# Altium PCB PCB.PcbDoc
Units mil, origin at the board's own origin, x right, y up, seen from the top; angles counter-clockwise.
Board outline 2885 x 3335 mil, 2 copper layers (Top Layer, Bottom Layer); 34 components, 39 nets, 135 pads, 32 vias.
Unrouted connection lines stored in the file: 2.
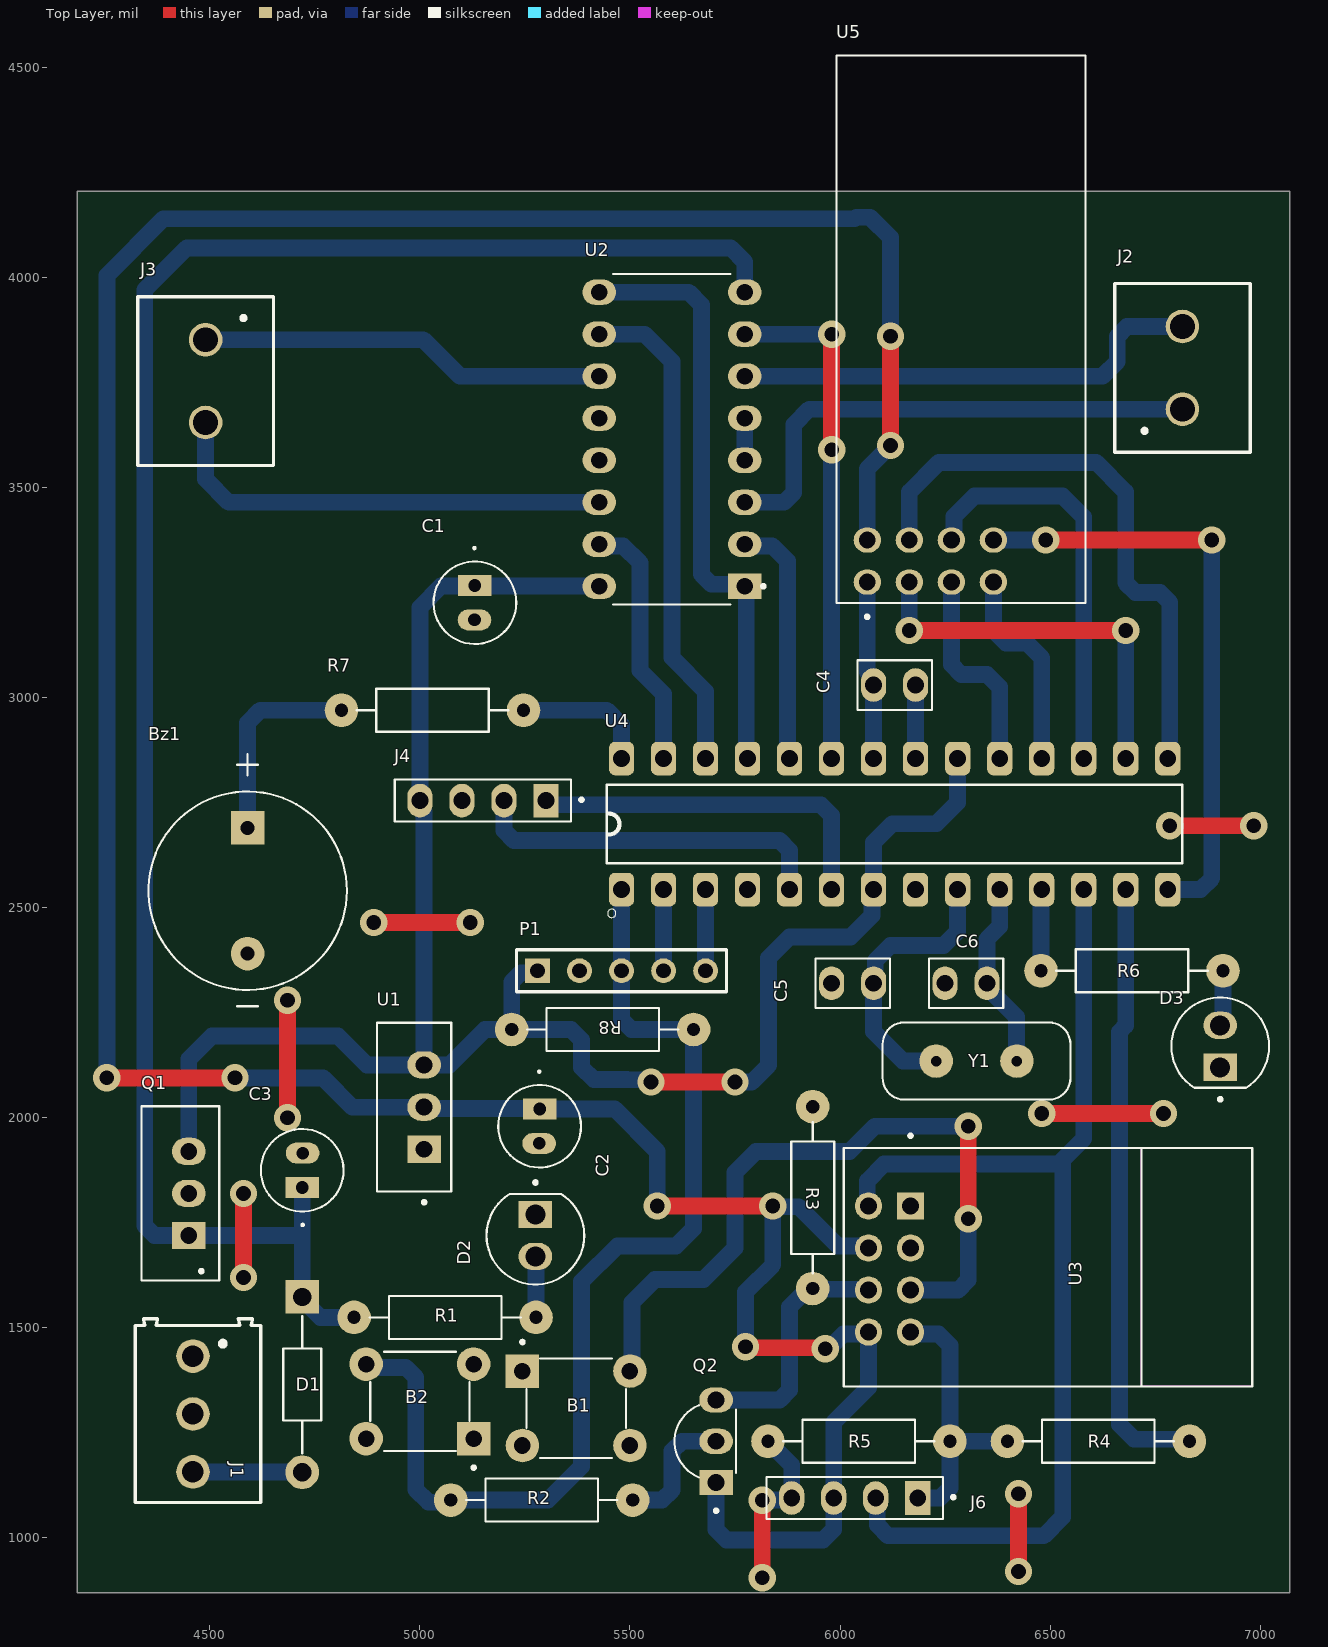
[diagram p0: Top Layer view]
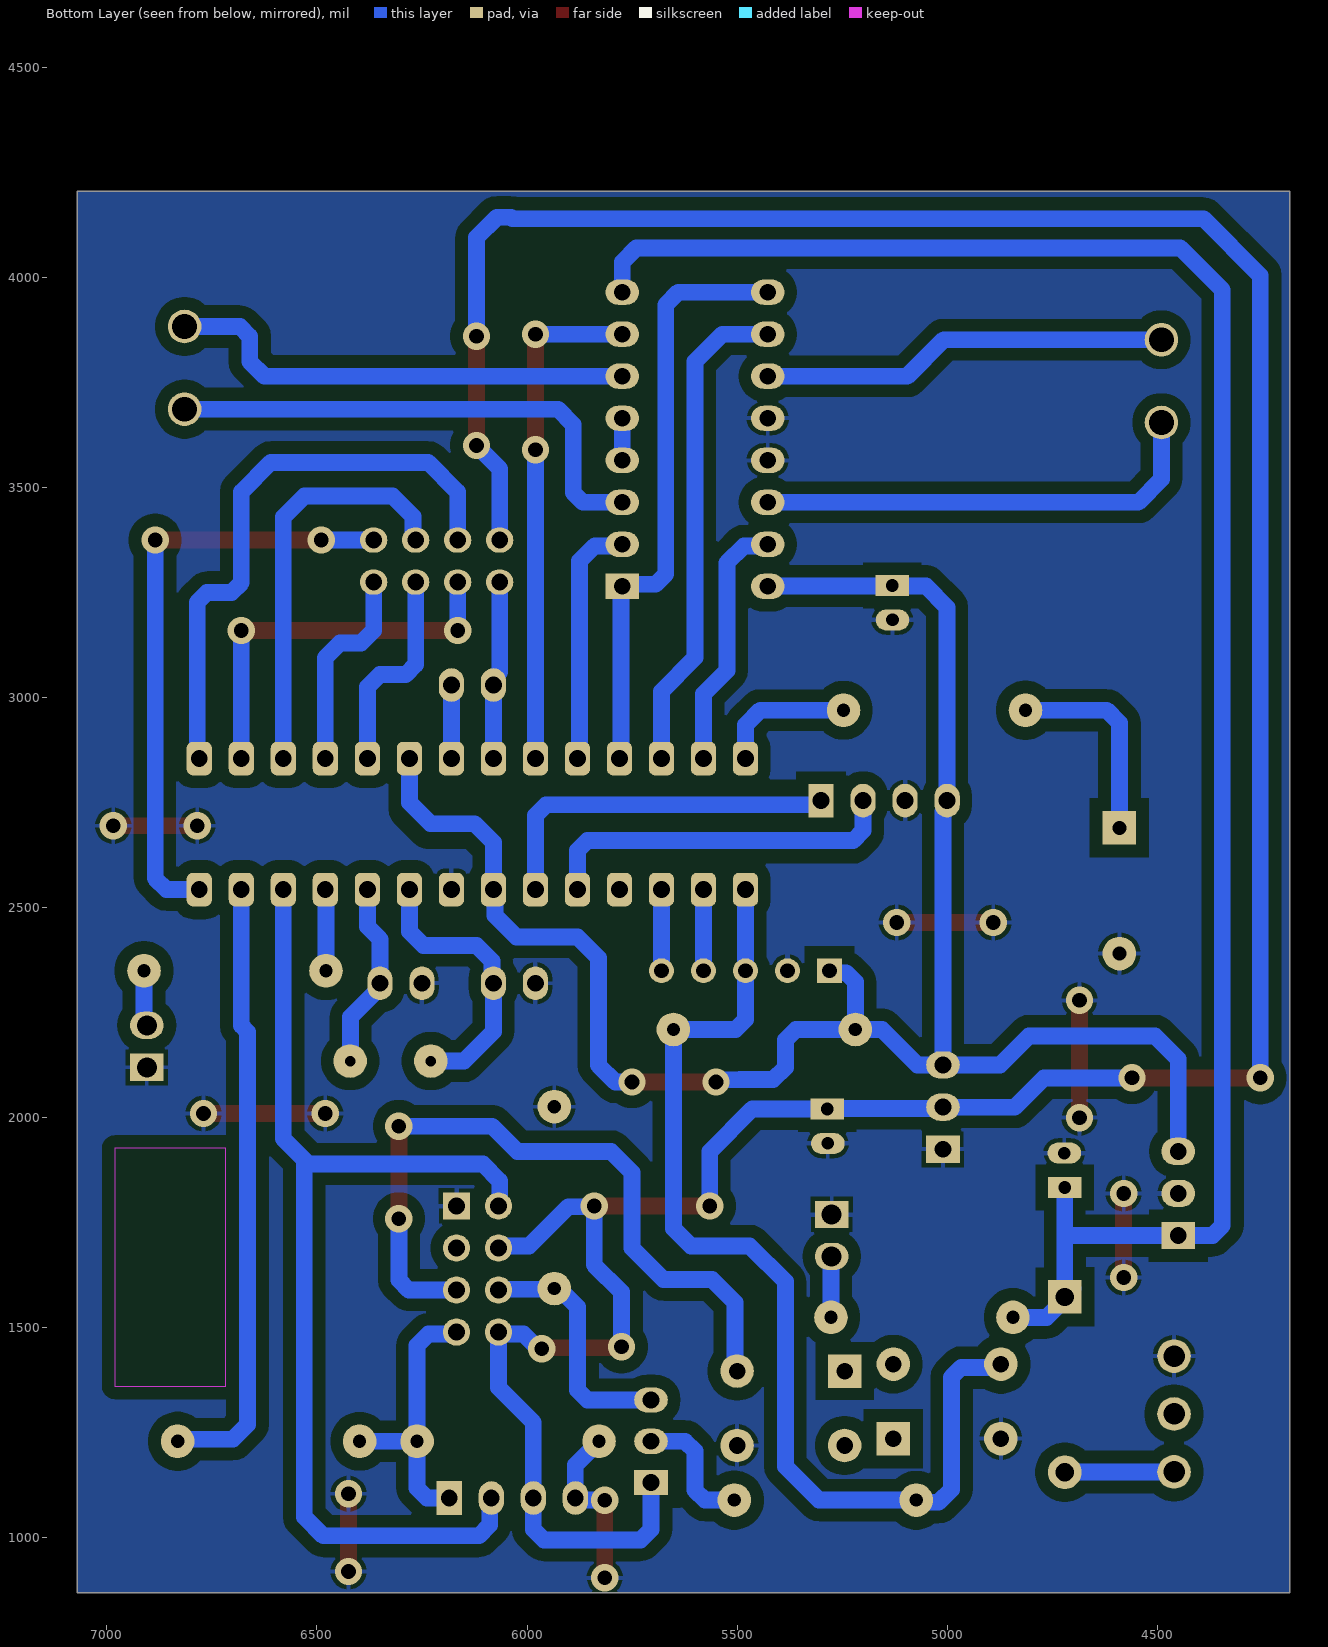
[diagram p1: Bottom Layer view, seen from below]
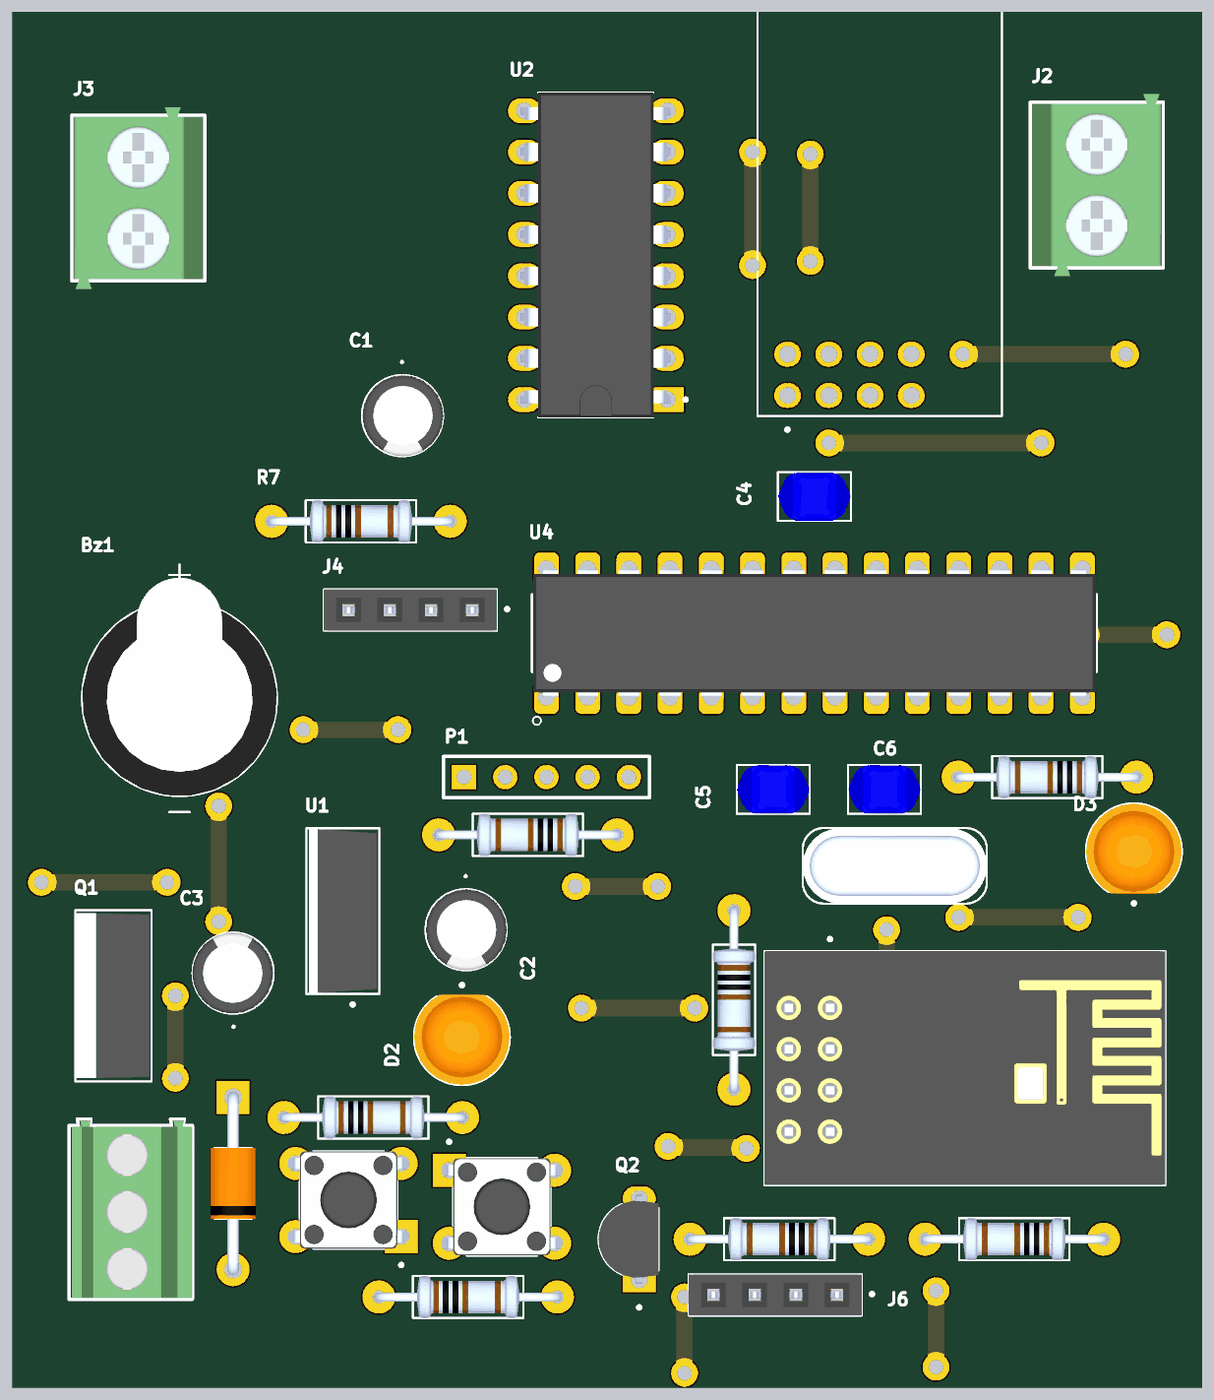
[diagram p2: 3D render of the assembled board from above, using the file's embedded part models]

## Layer stack, top to bottom
Top Solder: solder mask 0.4, Solder Resist, Dk 3.5
Top Layer: signal copper 1.4
Dielectric 1: dielectric 12.6, FR-4, Dk 4.8
Bottom Layer: signal copper 1.4
Bottom Solder: solder mask 0.4, Solder Resist, Dk 3.5

## Board outline
4185,870 7070,870 7070,4205 4185,4205

## Design rules (kind name [scope] priority, off if disabled: settings)
Clearance [All] p1: gap=30 ignorepadtopadclearanceinfootprint=FALSE
HoleSize [All] p1: absolutevalues=TRUE maxlimit=80 minlimit=40 maxpercent=80.000 minpercent=20.000
PolygonConnect [All] p1: connectstyle=Relief reliefconductorwidth=10 reliefentries=4 polygonreliefangle="90 Angle" airgapwidth=10
RoutingVias [All] p1: holewidth=40 width=70 viastyle="Through Hole" minholewidth=30 minwidth=60 maxholewidth=50 maxwidth=80
SolderMaskExpansion [All] p1: expansion=4 istentingtop=FALSE
UnRoutedNet [All] p1: checkbadconnections=TRUE
Width [All] p1: maxlimit=60 minlimit=40 preferedwidth=50
28 further rules are at their usual default settings.

## Components (designator, comment, footprint, x,y, rotation, side; value= is the part's Value field where it differs from the comment)
B1 "Push button" SW_TS02-66-95-BK-260-LCR-D 5372.05,1308.58 r0 top
B2 "Push button" SW_TS02-66-95-BK-260-LCR-D 5000,1325 r180 top
Bz1 "AI-1223-TWT-12V-R" XDCR_AI-1223-TWT-12V-R 4590,2540.39 r0 top
C1 "10uF" CAPPRD500W50D500H1100 5131,3226 r270 top
C2 "10uF" CAPPRD500W50D500H1100 5285,1980 r270 top
C3 "100uF" CAPPRD500W50D500H1100 4720,1875 r90 top
C4 "100nF" CAPRB500W50L450T300H550 6080,3030 r0 top
C5 "22pF" CAPRB500W50L450T300H550 5980,2320 r0 top
C6 "22pF" CAPRB500W50L450T300H550 6250,2320 r0 top
D1 "1N4007" DIOAD1060W70L435D230 4720,1365 r270 top
D2 "L08R5000Q1" LEDRD254W57D500H1070 5275,1720 r270 top
D3 "L08R5000Q1" LEDRD254W57D500H1070 6905,2170 r90 top
J1 "691214110003" 691214110003 4460,1295 r270 top
J2 "691111710002" 691111710002 6815,3785 r90 top
J3 "691111710002" 691111710002 4490,3753.43 r270 top
J4 "PPTC041LFBN-RC" SULLINS_PPTC041LFBN-RC 5150,2755 r180 top
J6 "PPTC041LFBN-RC" SULLINS_PPTC041LFBN-RC 6035,1095 r180 top
P1 "Header 5" HDR1X5 5280,2350 r0 top
Q1 "5V Regulator" TO254P1054X470X1955-3 4450,1820 r90 top
Q2 "BJT Transistor" TO92250P510H770-3 5679.21,1230 r90 top
R1 "3.3k" RESAD1100W55L680D260 5060,1525 r180 top
R2 "10k" RESAD1100W55L680D260 5290,1090 r180 top
R3 "10k" RESAD1100W55L680D260 5935,1810 r90 top
R4 "1k" RESAD1100W55L680D260 6615,1230 r0 top
R5 "2.2k" RESAD1100W55L680D260 6045,1230 r0 top
R6 "220" RESAD1100W55L680D260 6695,2350 r0 top
R7 "100" RESAD1100W55L680D260 5030,2970 r180 top
R8 "10k" RESAD1100W55L680D260 5435,2210 r0 top
U1 "3.3V Regulator" TO255P1020X450X1968-3 4986.18,2025.39 r90 top
U2 "L293D" DIP880W50P254L2000H510Q16 5600,3615 r180 top
U3 "ESP8266-01/ESP-01" XCVR_ESP8266-01/ESP-01 6495,1640 r270 top
U4 "ATMEGA328P-PU" DIP794W46P254L2967H457Q28B 6130,2699.09 r90 top
U5 "NRF24L01P-MODULE-PCB" XCVR_NRF24L01P-MODULE-PCB 6288.19,3876.75 r90 top
Y1 "ECS-160-S-4" XTAL_ECS-160-20-4X 6325,2135 r0 top

## Footprints (in the part's own frame and the unit in brackets; to place one, negate y for a bottom-side part, rotate by r counter-clockwise, add the part's x,y. Pads: shape width x height; smd on the part's side, far side on the other; paste and mask are expansions set on the pad)
691111710002 [mil]
  round 80 hole 59.06: 1(-98.43,0) 2(98.43,0)
  silkscreen extent -201,-161 201,161, body extent -220,-157 220,157, height 434
691214110003 [mil]
  round 80 hole 51.18: 1(-137.8,0) 2(0,0) 3(137.8,0)
  silkscreen extent -226,-138 211,161, body extent -223,-131 208,161, height 335
CAPPRD500W50D500H1100 [mil]
  oval 50x80 hole 30: N(41,-1)
  rect 50x80 hole 30: P(-41,0)
  silkscreen extent -131,-98 98,98, body extent -108,-97 108,99, height 434
CAPRB500W50L450T300H550 [mil]
  oval 60x80 hole 40: 1(0,0) 2(100,0)
  silkscreen extent -39,-59 139,59, body extent -38,-59 138,59, height 210
DIOAD1060W70L435D230 [mil]
  round 80 hole 43.31: A(208.66,0)
  rect 80x80 hole 43.31: C(-208.66,0)
  silkscreen extent -164,-45 164,45, body extent -222,-55 222,55, height 110
DIP794W46P254L2967H457Q28B [mil]
  rrect50% 80x60 hole 40: 1(-155.91,650) 2(-155.91,550) 3(-155.91,450) 4(-155.91,350) 5(-155.91,250) 6(-155.91,150) 7(-155.91,50) 8(-155.91,-50) 9(-155.91,-150) 10(-155.91,-250) 11(-155.91,-350) 12(-155.91,-450) 13(-155.91,-550) 14(-155.91,-650) 15(155.91,-650) 16(155.91,-550) 17(155.91,-450) 18(155.91,-350) 19(155.91,-250) 20(155.91,-150) 21(155.91,-50) 22(155.91,50) 23(155.91,150) 24(155.91,250) 25(155.91,350) 26(155.91,450) 27(155.91,550) 28(155.91,650)
  silkscreen extent -223,-685 94,685, body extent -156,-682 156,683, height 180
DIP880W50P254L2000H510Q16 [mil]
  rect 80x60 hole 40: 1(-173.23,350)
  oval 80x60 hole 40: 2(-173.23,250) 3(-173.23,150) 4(-173.23,50) 5(-173.23,-50) 6(-173.23,-150) 7(-173.23,-250) 8(-173.23,-350) 9(173.23,-350) 10(173.23,-250) 11(173.23,-150) 12(173.23,-50) 13(173.23,50) 14(173.23,150) 15(173.23,250) 16(173.23,350)
  silkscreen extent -221,-394 140,394, body extent -182,-394 182,394, height 201
HDR1X5 [mm] "Connector; Header; 5 Position"
  rect 1.5x1.5 hole 0.9: 1(0,0)
  round 1.5 hole 0.9: 2(2.54,0) 3(5.08,0) 4(7.62,0) 5(10.16,0)
  silkscreen extent -1.27,-1.27 11.43,1.27
LEDRD254W57D500H1070 [mil]
  oval 65x80 hole 47.64: A(50,0)
  rect 65x80 hole 47.64: C(-50,0)
  silkscreen extent -130,-116 116,116, body extent -102,-116 116,116, height 358
RESAD1100W55L680D260 [mil]
  round 80 hole 31.5: 1(-216.54,0) 2(216.54,0)
  silkscreen extent -180,-51 180,51, body extent -227,-51 227,51, height 101
SULLINS_PPTC041LFBN-RC [mil]
  rect 60x80 hole 40: 1(-150,0)
  oval 60x80 hole 40: 2(-50,0) 3(50,0) 4(150,0)
  silkscreen extent -239,-50 210,50, body extent -210,-50 210,50, height 335
SW_TS02-66-95-BK-260-LCR-D [mm]
  rect 2.032x2.032 hole 1: 1(-3.25,2.25)
  round 2.032 hole 1: 2(3.25,2.25) 3(-3.25,-2.25) 4(3.25,-2.25)
  silkscreen extent -3.35,-3 3,4.1, body extent -3.95,-3 3.94,3, height 9.7
TO254P1054X470X1955-3 [mil]
  rect 65x80 hole 40: 1(-100,0)
  oval 65x80 hole 40: 2(0,0) 3(100,0)
  silkscreen extent -207,-72 207,113, body extent -200,-68 200,113, height 770
TO255P1020X450X1968-3 [mil]
  rect 65x80 hole 40: 1(-100.39,-23.82)
  oval 65x80 hole 40: 2(0,-23.82) 3(100.39,-23.82)
  silkscreen extent -230,-89 201,89, body extent -200,-82 200,83, height 900
TO92250P510H770-3 [mil]
  rect 60x80 hole 40: 1(-98.43,-25.79)
  oval 60x80 hole 40: 2(0,-25.79) 3(98.43,-25.79)
  silkscreen extent -169,-73 86,73, body extent -107,-73 107,73, height 343
XCVR_ESP8266-01/ESP-01 [mil]
  rect 65x65 hole 40: 1(-150,-327.17)
  round 65 hole 40: 2(-50,-327.17) 3(50,-327.17) 4(150,-327.17) 5(-150,-427.17) 6(-50,-427.17) 7(50,-427.17) 8(150,-427.17)
  Keep-Out Layer region: 279.13,222.44 -287.8,222.44 -287.8,486.22 279.13,486.22
  silkscreen extent -321,-486 279,486, body extent -288,-486 278,486, height 256
XCVR_NRF24L01P-MODULE-PCB [mil]
  oval 60x65 hole 40: 1(-601.75,223.19) 2(-501.75,223.19) 3(-601.75,123.19) 4(-501.75,123.19) 5(-601.75,23.19) 6(-501.75,23.19) 7(-601.75,-76.81) 8(-501.75,-76.81)
  silkscreen extent -688,-297 652,297
XDCR_AI-1223-TWT-12V-R [mil]
  round 80 hole 33.46: N(0,-149.61)
  rect 80x80 hole 33.46: P(0,149.61)
  silkscreen extent -236,-275 236,325, body extent -236,-236 236,293, height 376
XTAL_ECS-160-20-4X [mil]
  round 80 hole 24.8: 1(-96.06,0) 2(96.06,0)
  silkscreen extent -223,-92 223,92, body extent -223,-92 223,92, height 138

## Part data
Bz1: library part Buzzer, "ELECTRO-MECHANICAL AUDIO INDICATOR", Package="2225 PUI Audio", Availability="In Stock", MF="PUI Audio,", MP=AI-1223-TWT-12V-R, Price=None, Purchase-URL=https://pricing.snapeda.com/search/part/AI-1223-TWT-12V-R/?ref=eda
C1 C2 C3: library part "Electrolytic capacitor", "FS-A", Package=None, Availability=Unavailable, MF="{'manufacturer': u'Panasonic'}", MP=EEUFS0J221B, Price=None
C4 C5 C6: library part "Ceramic capacitor", "2200 pF Â±10% 250V Ceramic Capacitor X7R Radial", Package="Radial TDK", Check_prices=https://www.snapeda.com/parts/FG24X7R2E222KNT06/TDK/view-part/?ref=eda, Digi-Key_Part_Number=445-173386-1-ND, MF=TDK, MP=FG24X7R2E222KNT06, Purchase-URL=https://pricing.snapeda.com/search/part/FG24X7R2E222KNT06/?ref=eda, SnapEDA_Link=https://www.snapeda.com/parts/FG24X7R2E222KNT06/TDK/view-part/?ref=snap
D1: library part Diode, "Diode Switching 1KV 1A 2-Pin DO-41", Package=None, Availability=Unavailable, MP=1N4007, Price=None
D2 D3: library part LED, "LED, Orange, Through Hole, T-1 3/4 (5mm), 30 mA, 2.1 V, 635 nm", Package=None, Availability=Unavailable, MF="{'manufacturer': u'LED Technology'}", MP=L08R5000Q1, Price=None
J1: library part "Terminal blocks - 3Pins (Small)", "3 Position Wire to Board Terminal Block Horizontal with Board 0.138 (3.50mm) Through Hole", Package=None, Availability="In Stock", Check_prices=https://www.snapeda.com/parts/691214110003/Wurth+Elektronik/view-part/?ref=eda, MF="Wurth Elektronik", MP=691214110003, Price=None, Purchase-URL=https://pricing.snapeda.com/search/part/691214110003/?ref=eda, SnapEDA_Link=https://www.snapeda.com/parts/691214110003/Wurth+Elektronik/view-part/?ref=snap
J2 J3: library part "Terminal Block - 2Pins", "2 Position Wire to Board Terminal Block Horizontal with Board 0.197 _5.00mm_ Through Hole", Package=None, Availability=Unavailable, MF="Wurth Electronics", MP=691111710002, Price=None, SnapEDA_Link=https://www.snapeda.com/parts/691111710002/Wurth%20Electronics%20Inc./view-part/1195092/?ref=snap
J4 J6: library part "Female header - 4Pins", "4 Position Header Connector Through Hole", Package=None, Availability=Warning, Check_prices=https://www.snapeda.com/parts/PPTC041LFBN-RC/Sullins%20Connector%20Solutions/view-part/285917/?ref=eda, MF="Sullins Connector", MP=PPTC041LFBN-RC, Price=None, Purchase-URL=https://pricing.snapeda.com/search/part/PPTC041LFBN-RC/?ref=eda, SnapEDA_Link=https://www.snapeda.com/parts/PPTC041LFBN-RC/Sullins%20Connector%20Solutions/view-part/285917/?ref=snap
P1: "Header, 5-Pin", LatestRevisionDate=17-Jul-2002, LatestRevisionNote="Re-released for DXP Platform.", Publisher="Altium Limited"
Q1: library part LM7805, Package=None, Availability=Unavailable, MP=LM7805CT/NOPB, Price=None
Q2: library part BC547B, "<a href=\"https://pricing.snapeda.com/parts/BC337-16%20A1/Taiwan%20Semiconductor/view-part?ref=eda\">Check availability</a> <a href=\"https://pricing.snapeda.com/parts/BC337-16%20A1/Taiwan%20Semiconductor/view-part?ref=eda\">Check availability</a>", Package=None, Availability=Unavailable, MP=BC547B, Price=None
R1 R2 R3 R4 R5 R6 R7 R8: library part "Resistor (0.25W)", "(MFR-25FBF52-10K) 10,2 kOhm bei 1% 0,25W, 1/4W Durchbohrlochwiderstand Axial Metal Film", Package="Axial Yageo", Digi-Key_Part_Number=10.2KXBK-ND, MF=Yageo, MP=MFR-25FBF52-10K, Purchase-URL=https://pricing.snapeda.com/search/part/MFR-25FBF52-10K/?ref=eda, SnapEDA_Link=https://www.snapeda.com/parts/MFR-25FBF52-10K/Yageo/view-part/424333/?ref=snap
U1: library part LD1117V33, Package=None, Availability=Unavailable, MP=LD1117V33, Price=None
U2: "4-Channel Motor Driver 24V 16-Pin Power PDIP Tube", Package=None, Availability=Unavailable, MP=L293D, Price=None
U3: library part "ESP8266-01 Module", "MakerFocus 4pcs ESP8266 ESP-01 Serial Wireless WiFi Transceiver Receiver Module 1MB SPI Flash DC3.0-3.6V Internet of Things WiFi Module Board Compatible with Ar duino", Package=None, Availability=Unavailable, MP=ESP8266-01/ESP-01, Price=None
U4: "ATmega Series 20 MHz 32 KB Flash 2 KB SRAM 8-Bit Microcontroller - DIP-28", Package=None, Availability=Unavailable, MP=ATMEGA328P-PU, Price=None
U5: "- Transceiver For Use With nRF24L01+", Package=None, Availability=Bad, MF="Nordic Semiconductor", Mouser-Purchase-URL=https://snapeda.com/shop?store=Mouser&id=230534, MP=NRF24L01P-MODULE-PCB, Price=None, SnapEDA_Link=https://www.snapeda.com/parts/NRF24L01P-MODULE-PCB/Nordic%20Semiconductor%20ASA/view-part/230534/?ref=snap
Y1: library part "Crystal oscilator", "CRYSTAL T/H", Package=None, Availability=Unavailable, MF="{'manufacturer': u'ECS Inc.'}", MP=ECS-160-S-4, Price=None

## Via types
v1: diameter 65, hole 35, Top Layer to Bottom Layer, 32 vias

## Nets (pads, with @x,y where several pads share a name; then routed paths per layer and width w, separated by ;. In a path a pad name is that pad's centre, name@x,y a point inside that pad or via, vN(x,y) a via of type N, cw(c..) or ccw(c..) an arc to the next point about the centre after c; other vN are vias at no path point)
+3.3: C2.P J6.3 Q2.1 U1.2 U3.6 U3.8 U5.2 | length 8241.8
  Top Layer w40: v1(4255,2095) v1(4560,2095) ; v1(5565,1790) v1(5840,1790) ; v1(5775,1455) 5777.5,1452.5 5962.5,1452.5 v1(5965,1450) ; v1(6120,3600) v1(6120,3860)
  Bottom Layer w40: v1(4255,2095) 4255,4005 4390,4140 6035,4140 6038.43,4143.43 6071.57,4143.43 6120,4095 v1(6120,3860) ; v1(4560,2095) 4770,2095 4840,2025 5009.61,2025 U1.2 5013.39,2022 C2.P@5285,2022 ; C2.P 5464,2021 5565,1920 v1(5565,1790) ; Q2.1 5705,1020 5730,995 5960,995 5985,1020 J6.3 5985,1275 6067.83,1357.83 U3.8 6063.05,1485.22 6008.33,1485.22 5973.12,1450 v1(5965,1450) ; v1(5775,1455) 5775,1585 5840,1650 v1(5840,1790) 5841.91,1788.09 5901.91,1788.09 5995.22,1694.78 6063.05,1694.78 U3.6 ; U5.2 6065,3545 v1(6120,3600)
+5: C1.P J4.4 P1.1 Q1.3 R8.1 U1.3 U2.16 U4.7 U4.20 | length 4582.8
  Top Layer w40: v1(5550,2085) v1(5750,2085)
  Bottom Layer w40: Q1.3 4450,2140 4505,2195 4805,2195 4874.21,2125.79 U1.3 ; P1.1 5275,2345 5240,2345 5218.46,2323.46 R8.1 ; U2.16 5426.27,3265.5 5050.5,3265.5 5000,3215 5000,2739.59 5010,2729.59 U1.3 ; v1(5550,2085) 5544.26,2090.74 5493.25,2090.74 5492.99,2091 5414,2091 5385,2120 5385,2185 5360,2210 R8.1 ; v1(5750,2085) 5790,2085 5830,2125 5830,2380 5880,2430 6025,2430 6076.06,2481.06 6076.06,2539.25 U4.7 6080,2655 6125,2700 6230,2700 6280,2750 U4.20 ; U1.3 5070.79,2125.79 5155,2210 R8.1
+12: C3.P D1.C Q1.1 R1.2 U2.8 | length 4586.9
  Bottom Layer w40: D1.C@4700,1593.66 4740,1553.66 4740,1548.43 4763.43,1525 R1.2 ; C3.P@4710,1830 4715,1830 4720,1825 4720,1725 ; D1.C@4720,1593.66 4720,1725 ; U2.8 5773.23,4036.77 5740,4070 4445,4070 4345,3970 4345,1743.43 4368.43,1720 4715,1720 4720,1725
bluetooth_Rx: J4.1 U4.6 | length 871.3
  Bottom Layer w40: J4.1 5310,2745 5955,2745 5980,2720 U4.6
bluetooth_Tx: J4.2 U4.5 | length 864.4
  Bottom Layer w40: J4.2 5200,2683.43 5223.43,2660 5856.57,2660 5880,2636.57 U4.5
buzzer: R7.1 U4.28 | length 328
  Bottom Layer w40: R7.1 5445,2970 5480,2935 U4.28
CSN: U4.15 U5.4 | length 1402.6
  Bottom Layer w40: U5.4 6165,3490 6235,3560 6610,3560 6680,3490 6680,3273.43 6703.43,3250 6761.57,3250 6785,3226.57 6785,2860 U4.15
enable_wheels: U2.1 U2.9 U4.25 | length 1425
  Bottom Layer w40: U2.9 5640,3965 5670,3935 5670,3293.49 5693.43,3270.06 5768.17,3270.06 U2.1 5776.61,3261.61 5776.61,2858.39 U4.25
GND: B1.4 B2.2 Bz1.N C1.N C2.N C3.N C4.1 C5.1 C6.1 D2.C D3.C J1.1 J4.3 J6.4 P1.2 Q1.2 R3.2 R5.1 U1.1 U2.4 U2.5 U2.12 U2.13 U3.1 U4.8 U4.22 U5.1 | length 2326.7
  Top Layer w40: v1(4580,1620) v1(4580,1820) ; v1(4685,2000) v1(4685,2280) ; v1(4890,2465) v1(5120,2465) ; v1(5815,905) v1(5815,1090) ; v1(6425,920) v1(6425,1105) ; v1(6480,2010) v1(6770,2010) ; v1(6785,2695) v1(6985,2695)
  Bottom Layer w40: U2.4 U2.5 ; v1(5815,1090) 5880,1090 J6.4 5885,1173.46 R5.1 ; U5.1 6065,3060.41 6080,3045.41 C4.1 U4.22
IRQ: U4.14 U5.8 | length 1441.1
  Top Layer w40: v1(6490,3375) v1(6885,3375)
  Bottom Layer w40: U5.8 v1(6490,3375) ; U4.14 6858.19,2543.19 6885,2570 v1(6885,3375)
left_wheel_pin1: U2.2 U4.24 | length 590.4
  Bottom Layer w40: U2.2 5777.06,3361.17 5838.83,3361.17 5875,3325 5875,2860 U4.24
left_wheel_pin2: U2.7 U4.23 | length 1216.8
  Top Layer w40: v1(5980,3590) v1(5980,3865)
  Bottom Layer w40: U2.7 v1(5980,3865) ; U4.23 v1(5980,3590)
NetB1_2: B1.2 U3.3 | length 1757.6
  Top Layer w40: v1(6305,1760) v1(6305,1980)
  Bottom Layer w40: B1.2 5505,1402.17 5505,1560 5560,1615 5675,1615 5750,1690 5750,1870 5800,1920 6022.83,1920 6082.83,1980 v1(6305,1980) ; U3.3 6168.17,1590.33 6281.57,1590.33 6305,1613.77 v1(6305,1760)
NetBz1_P: Bz1.P R7.2 | length 485.9
  Bottom Layer w40: Bz1.P 4590,2940 4620,2970 R7.2
NetC4_2: C4.2 U4.21 | length 175
  Bottom Layer w40: U4.21 C4.2
NetD1_A: D1.A J1.3 | length 255.9
  Bottom Layer w40: J1.3 D1.A@4715.87,1157.2
NetD2_A: D2.A R1.1 | length 145
  Bottom Layer w40: R1.1 D2.A@5276.54,1670
NetD3_A: D3.A R6.2 | length 138.5
  Bottom Layer w40: D3.A@6911.54,2211.54 R6.2
NetJ2_1: J2.1 U2.3 | length 1228.2
  Bottom Layer w40: U2.3 5866.57,3465 5890,3488.43 5890,3650 5926.57,3686.57 J2.1
NetJ2_2: J2.2 U2.6 | length 1126
  Bottom Layer w40: U2.6 6625,3765 6660,3800 6660,3859.99 6683.43,3883.43 J2.2
NetJ3_1: J3.1 U2.11 | length 972.7
  Bottom Layer w40: J3.1 5008.15,3851.85 5095,3765 U2.11
NetJ3_2: J3.2 U2.14 | length 1094.6
  Bottom Layer w40: J3.2 4490,3520 4545,3465 U2.14
NetP1_4: P1.4 U4.2 | length 193.2
  Bottom Layer w40: P1.4 U4.2
NetP1_5: P1.5 U4.3 | length 193.2
  Bottom Layer w40: P1.5 U4.3
NetQ2_2: Q2.2 R2.1 | length 311
  Bottom Layer w40: R2.1 5576.57,1090 5600,1113.43 5600,1206.57 5623.43,1230 Q2.2
NetQ2_3: Q2.3 R3.1 U3.7 | length 590.1
  Bottom Layer w40: Q2.3 5856.57,1328.43 5880,1351.86 5880,1550.03 5903.43,1573.46 5904.18,1573.46 5924.18,1593.46 R3.1 5936.73,1591.73 6066.1,1591.73 U3.7
NetR4_2: R4.2 U4.13 | length 1462.5
  Bottom Layer w40: U4.13 6680,2219.09 6665,2204.09 6665,1270 6700,1235 6826.54,1235 R4.2
NetR6_1: R6.1 U4.11 | length 193.2
  Bottom Layer w40: R6.1 U4.11@6478.46,2543.19
NetU4_16: U4.16 U5.3 | length 935
  Top Layer w40: v1(6165,3160) v1(6680,3160)
  Bottom Layer w40: v1(6165,3160) U5.3 ; U4.16 v1(6680,3160)
NetU4_17: U4.17 U5.6 | length 983.5
  Bottom Layer w40: U5.6 6271.33,3381.33 6271.33,3431.33 6320,3480 6530,3480 6580,3430 U4.17
NetU4_18: U4.18 U5.7 | length 496.9
  Bottom Layer w40: U5.7 6365,3160 6395,3130 6445,3130 6480,3095 U4.18
NetU4_19: U4.19 U5.5 | length 503.7
  Bottom Layer w40: U5.5 6265,3078.43 6288.43,3055 6350,3055 6380,3025 U4.19
reset: B2.4 P1.3 R2.2 R8.2 U4.1 | length 2564.4
  Bottom Layer w40: B2.4 4879.7,1405.93 4966.57,1405.93 4990,1382.5 4990,1115 5020,1085 5068.46,1085 R2.2 5305,1090 5385,1170 5385,1610 5470,1695 5610,1695 5651.54,1736.54 R8.2 5503.43,2210 5480,2233.43 U4.1
right_wheel_pin1: U2.10 U4.26 | length 1178.3
  Bottom Layer w40: U2.10 5535,3865 5600,3800 5600,3095 5680,3015 U4.26
right_wheel_pin2: U2.15 U4.27 | length 604.6
  Bottom Layer w40: U2.15 5430.6,3361.17 5483.83,3361.17 5523.83,3321.17 5523.83,3064.72 5580,3008.54 U4.27
Rx: J6.1 R4.1 R5.2 U3.4 | length 670
  Bottom Layer w40: U3.4 6172.62,1485.22 6234.78,1485.22 6261.54,1458.46 R5.2 ; J6.1 6238.1,1095 6261.54,1118.43 R5.2 ; R4.1 R5.2
Tx: J6.2 U3.5 U4.12 | length 2597.2
  Bottom Layer w40: U3.5 6065,1792.83 6065,1850 6105,1890 6520,1890 6580,1950 U4.12 ; J6.2 6088.83,1091.17 6088.83,1030.58 6114.4,1005 6485,1005 6530,1050 6530,1900
XTAL1: C5.2 U4.9 Y1.1 | length 687.7
  Bottom Layer w40: C5.2 6083.64,2323.64 6083.64,2373.64 6120,2410 6246.81,2410 6280,2443.19 U4.9 ; C5.2@6080,2334.44 6080,2205 6150,2135 Y1.1
XTAL2: C6.2 U4.10 Y1.2 | length 459.4
  Bottom Layer w40: U4.10 6380,2455 6350,2425 C6.2 6350,2310 6420,2240 6420,2136.06 Y1.2 ; Y1.2@6413.41,2141.59 Y1.2@6420,2135
pads on no net: B1.1 B1.3 B2.1 B2.3 J1.2 U3.2 U4.4
copper on no net: | length 3.5
  Bottom Layer w40: 5780,2543.19 5782.5,2540.69

## Polygon pours and split planes (outlines as drawn)
GND on Bottom Layer "NONET_L02_P-001" (solid, remove dead copper, pour order 0): 4185,4205 4185,870 7070,870 7070,4205